# Allegro board Arduino-UNO.brd
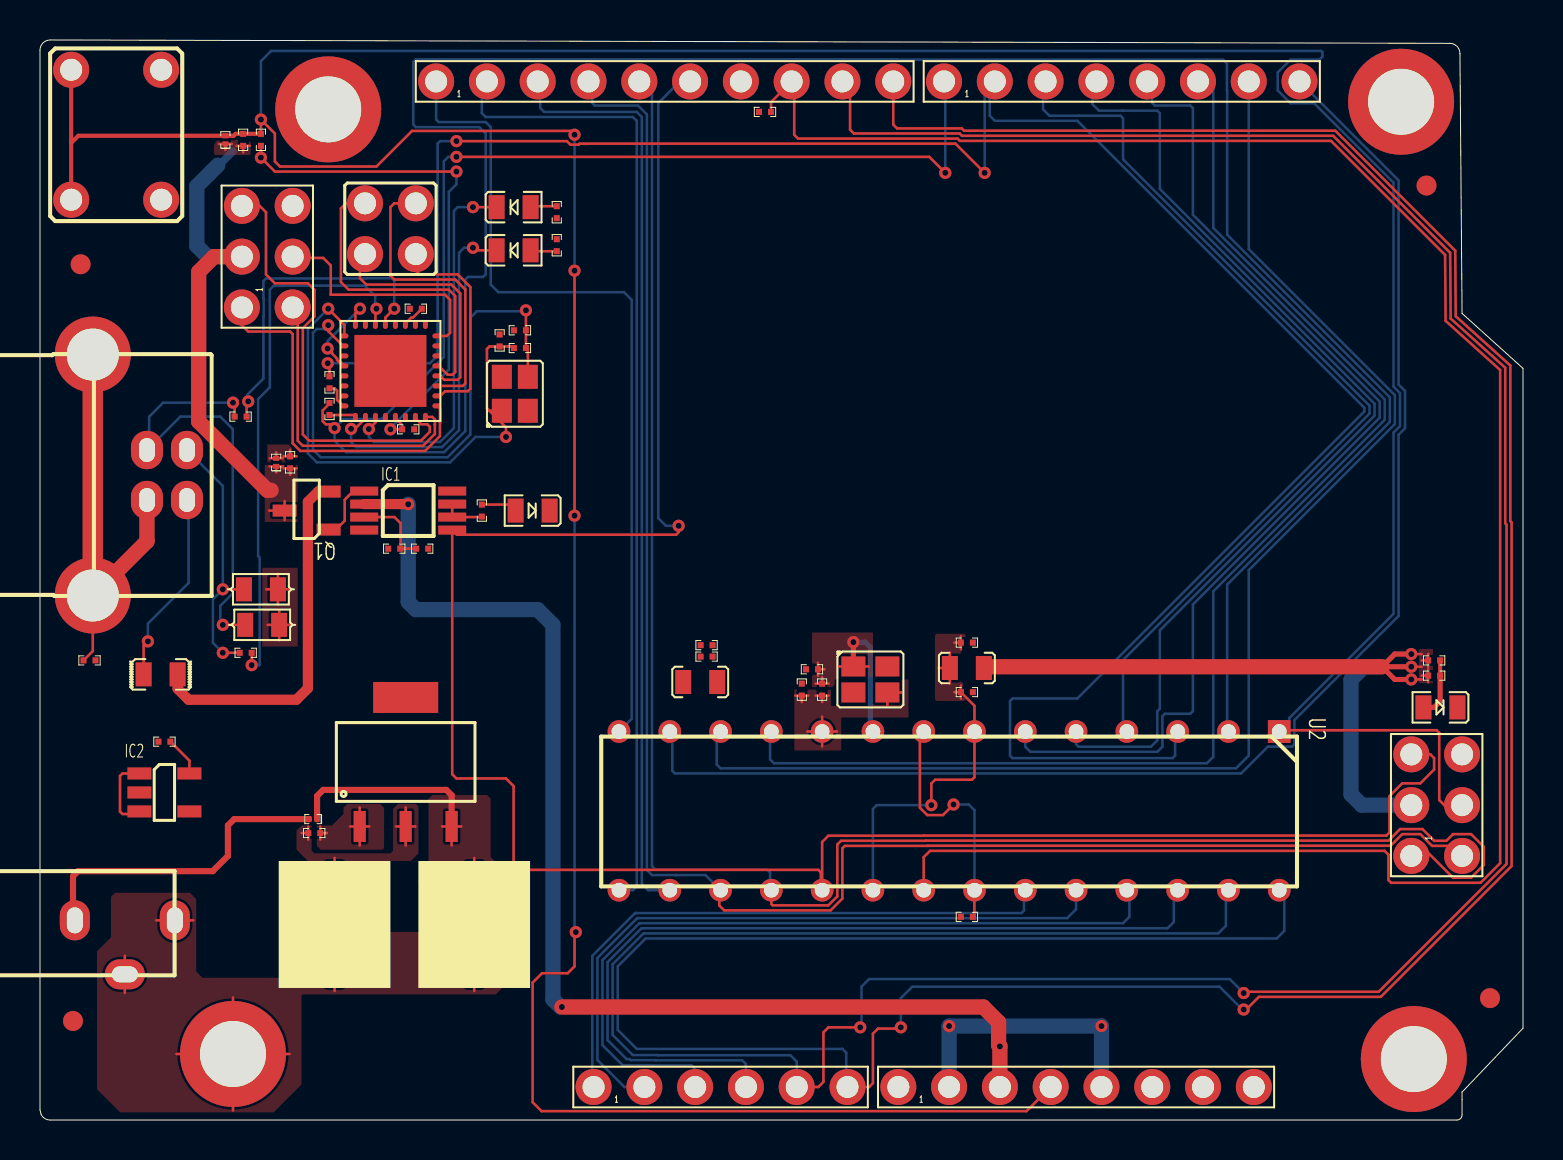
[diagram p0: board, top side]
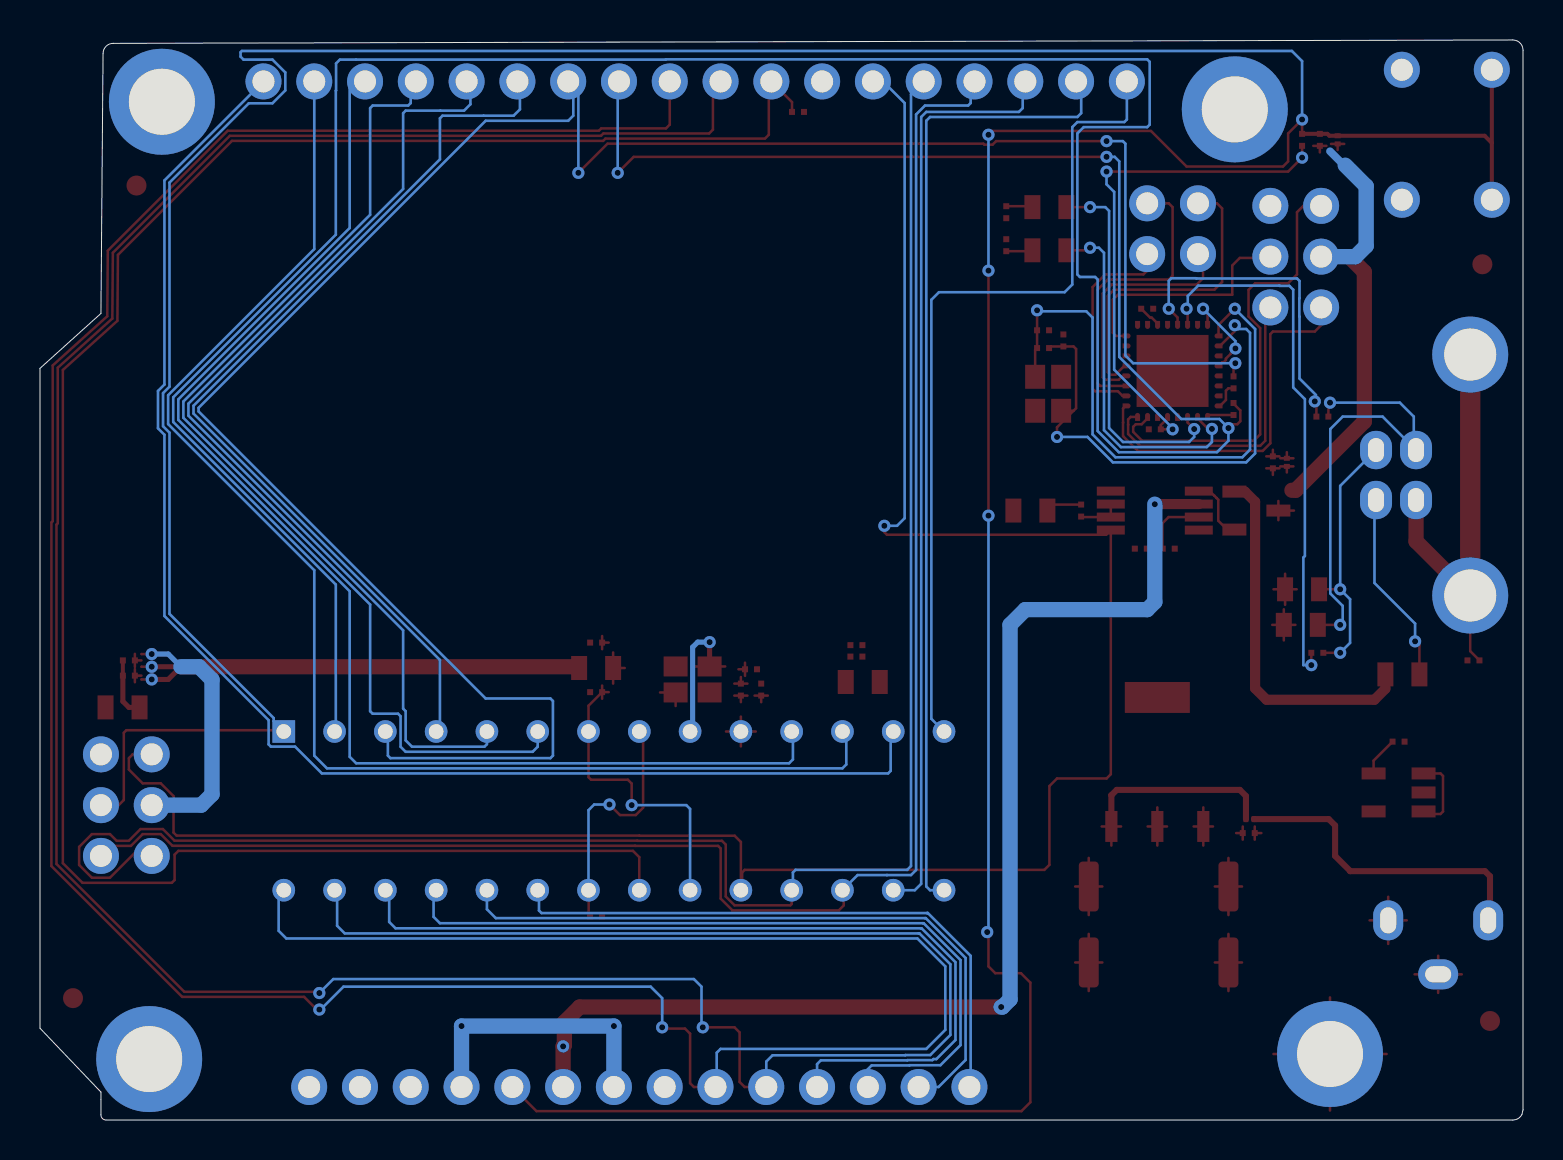
[diagram p1: board, bottom side, seen from below]

Outline 74.17 x 54.02 mm; copper layers: TOP, BOTTOM. Coordinates in mm from the lower left corner of the outline.
Outline path: 0,53.51 arc(0.15,53.87) 0.51,54.02 70.48,53.85 arc(70.86,53.71) 71.01,53.34 71.12,40.34 74.17,37.59 74.17,4.59 71.12,1.4 71.12,0.25 arc(71.05,0.07) 70.87,0 0.51,0 arc(0.24,0.07) 0.06,0.28 0,0.51 0,53.51

## Design rules (mm)
constraint set DEFAULT: min track width 0.127

## Placement (name value [footprint] x y rotation side)
C2  100n  [SMD0603]  36.26 50.42 180 top
C3  100n  [SMD0603]  24 39.5 0 top
C4  100n  [SMD0603]  22.99 38.99 270 top
C5  100n  [SMD0603]  38.1 21.53 270 top
C6  100n  [SMD0603]  33.34 23.18 0 top
C7  100n  [SMD0603]  11.05 49.02 90 top
C8  100n  [SMD0603]  33.34 23.75 0 top
C9  1u  [SMD0603]  18.8 40.58 180 top
C10  100n  [SMD0603]  38.61 22.54 0 top
C13  100n  [SMD0603]  2.48 22.99 180 top
C14  100n  [SMD0603]  46.35 10.16 180 top
C15  47u  [SOLID_CAP_5X5_4]  21.72 9.78 0 top
C16  47u  [SOLID_CAP_5X5_4]  14.73 9.78 0 top
C17  100n  [SMD0603]  13.72 14.35 0 top
C18  1u  [SMD0603]  6.22 18.92 180 top
C19  100n  [SMD0603]  46.35 23.88 0 top
C20  100n  [SMD0603]  46.35 21.4 0 top
CETCE16M0V53-R1  -  [16MHZ]  23.75 36.32 90 top
CETCE16M0V53-R2  -  [16MHZ]  41.53 22.03 0 top
D1  DIODE  [ESD_DIODE]  11.81 32.89 90 top
D2  RED  [LED_0805]  70.04 20.64 180 top
D3  DIODE  [ESD_DIODE]  9.27 49.02 90 top
D5  YELLOW  [LED_0805]  23.69 43.5 0 top
D6  DIODE  [ESD_DIODE]  13.65 15.05 180 top
D7  LED  [LED_0805]  24.64 30.48 180 top
D8  YELLOW  [LED_0805]  23.69 45.66 0 top
F1  MF-MSMF050-2 500mA  [FUSE_0805]  6.03 22.29 0 top
F2  fiducial  [FID2R00_1R00]  72.52 6.1 0 top
F3  fiducial  [FID2R00_1R00]  1.65 4.95 0 top
F4  fiducial  [FID2R00_1R00]  69.34 46.74 0 top
F5  fiducial  [FID2R00_1R00]  2.03 42.8 0 top
IC1  LMV358IDGKR  [SOP-8]  18.41 30.48 0 top
IC2  LP2985-33DBVR  [SOT-5]  6.22 16.38 0 top
J1  POWER  [HEADER1X8]  51.82 1.65 0 top
J2  ICSP1  [HEADER2X3]  11.37 43.18 90 top
J3  ICSP  [HEADER2X3]  69.85 15.75 90 top
J4  HEADER 10  [HEADER1X10]  31.24 51.94 0 top
J5  HEADER 4  [HEADER2X2]  17.53 44.58 180 top
J6  HEADER 8  [HEADER1X8]  54.1 51.94 0 top
J7  USB  [USB2_0_TYPE-B]  6.35 32.26 270 top
J8  HEADER 6  [HEADER1X6]  34.04 1.65 0 top
J9  DC-005C-2A-1.3  [12V-JACK]  1.14 8.64 0 top
L2  BEAD  [BEAD_0805]  33.02 21.91 0 top
L3  BEAD  [BEAD_0805]  46.35 22.61 180 top
Q1  FDN340P  [SOT-3]  13.34 30.48 180 top
R1  10K  [SMD0603]  12.51 32.89 90 top
R2  1K  [SMD0603]  69.72 22.22 0 top
R3  1K  [SMD0603]  69.72 22.99 0 top
R4  10K  [SMD0603]  10.16 49.02 90 top
R5  1M  [SMD0603]  24 38.61 180 top
R7  1M  [SMD0603]  39.12 21.53 90 top
R8  1K  [SMD0603]  18.41 34.54 0 top
R9  1K  [SMD0603]  25.84 45.4 270 top
R10  22R  [SMD0603]  10.29 23.37 0 top
R11  22R  [SMD0603]  10.03 35.18 0 top
R12  1K  [SMD0603]  25.84 43.75 90 top
R13  1K  [SMD0603]  14.48 35.56 90 top
R14  1K  [SMD0603]  14.48 36.89 90 top
R15  10K  [SMD0603]  17.72 28.57 0 top
R16  1K  [SMD0603]  22.1 30.48 90 top
R17  10K  [SMD0603]  19.11 28.57 0 top
RV1  VARISTOR  [VAR_0805]  11.05 26.54 0 top
RV2  VARISTOR  [VAR_0805]  11.11 24.77 0 top
SW1  SW DPST  [SW]  3.81 49.28 90 top
T1  mounthing hole  [MTH]  9.65 3.3 0 top
T2  mounthing hole  [MTH]  68.71 3.05 0 top
T3  mounthing hole  [MTH]  68.07 50.93 0 top
T4  mounthing hole  [MTH]  14.41 50.55 0 top
U1  ATMEGA16U2-MUR  [QFN33]  17.53 37.47 0 top
U2  ATMEGA328P-PU  [DIP28]  61.98 19.43 270 top
U3  NCP1117ST50T3G  [SOT-23]  18.29 17.91 0 top

## Library data of the parts
C2-C10 C13 C14 C17-C20 = CAP NP
C15 C16 = CAP
CETCE16M0V53-R1 CETCE16M0V53-R2 = CRYSTAL_2
D1 D3 D6 = DIODE
D2 D5 D7 D8 = LED
F1 = FUSE
F2-F5 = fiducial
IC1 = LMV358IDGKR
IC2 = LP2985-33DBVR_1
J1 J6 = HEADER 8
J2 J3 = HEADER 6_0
J4 = HEADER 10
J5 = HEADER 4_1
J7 = HEADER 4_2
J8 = HEADER 6
J9 = DC-005C-2A-1.3
L2 L3 = BEAD
Q1 = FDN340P_0
R1-R5 R7-R17 = RESISTOR
RV1 RV2 = VARISTOR
SW1 = SW DPST
T1-T4 = mounthing hole
U1 = ATMEGA16U2-MUR_5
U2 = ATMEGA328P-PU_5
U3 = NCP1117ST50T3G_0

## Footprints (pads in the part's own frame, mm; a bottom-side part is the same pattern mirrored in y, then rotated)
12V-JACK
  oval 1.5x2 hole 0.8x1.3: 1(5.6,1.35) 2(0.6,1.35)
  oval 2x1.5 hole 1.3x0.8: 3(3.1,-1.35)
16MHZ
  rect 1.2x1 smd: 1(-0.85,0.65) 2(0.85,0.65) 3(0.85,-0.65) 4(-0.85,-0.65)
BEAD_0805
  rect 0.8x1.2 smd: 1(-0.85,0) 2(0.85,0)
DIP28
  rect 1.133x1.133 hole 0.733: 1(0,0)
  round 1.133 hole 0.733: 2(0,-2.54) 3(0,-5.08) 4(0,-7.62) 5(0,-10.16) 6(0,-12.7) 7(0,-15.24) 8(0,-17.78) 9(0,-20.32) 10(0,-22.86) 11(0,-25.4) 12(0,-27.94) 13(0,-30.48) 14(0,-33.02) 15(7.938,-33.02) 16(7.938,-30.48) 17(7.938,-27.94) 18(7.938,-25.4) 19(7.938,-22.86) 20(7.938,-20.32) 21(7.938,-17.78) 22(7.938,-15.24) 23(7.938,-12.7) 24(7.938,-10.16) 25(7.938,-7.62) 26(7.938,-5.08) 27(7.938,-2.54) 28(7.938,0)
ESD_DIODE
  rect 0.25x0.3 smd: 1(-0.203,0) 2(0.203,0)
FID2R00_1R00
  round 1 smd: 1(0,0)
FUSE_0805
  rect 0.8x1.2 smd: 1(-0.85,0) 2(0.85,0)
HEADER1X6
  round 1.8 hole 1.1: 1(-6.35,0) 2(-3.81,0) 3(-1.27,0) 4(1.27,0) 5(3.81,0) 6(6.35,0)
HEADER1X8
  round 1.8 hole 1.1: 1(-8.89,0) 2(-6.35,0) 3(-3.81,0) 4(-1.27,0) 5(1.27,0) 6(3.81,0) 7(6.35,0) 8(8.89,0)
HEADER1X10
  round 1.8 hole 1.1: 1(-11.43,0) 2(-8.89,0) 3(-6.35,0) 4(-3.81,0) 5(-1.27,0) 6(1.27,0) 7(3.81,0) 8(6.35,0) 9(8.89,0) 10(11.43,0)
HEADER2X2
  round 1.8 hole 1.1: 1(-1.27,1.27) 2(1.27,1.27) 3(-1.27,-1.27) 4(1.27,-1.27)
HEADER2X3
  round 1.8 hole 1.1: 1(-2.54,1.27) 2(0,1.27) 3(2.54,1.27) 4(-2.54,-1.27) 5(0,-1.27) 6(2.54,-1.27)
LED_0805
  rect 0.8x1.2 smd: 1(-0.85,0) 2(0.85,0)
MTH
  round 5.3 hole 3.3 unplated: (0,0)
QFN33
  custom 0.4x0.25 smd: 1(-2.3,1.75) 2(-2.3,1.25) 3(-2.3,0.75) 4(-2.3,0.25) 5(-2.3,-0.25) 6(-2.3,-0.75) 7(-2.3,-1.25) 8(-2.3,-1.75) 17(2.3,-1.75) 18(2.3,-1.25) 19(2.3,-0.75) 20(2.3,-0.25) 21(2.3,0.25) 22(2.3,0.75) 23(2.3,1.25) 24(2.3,1.75)
  custom 0.25x0.4 smd: 9(-1.75,-2.3) 10(-1.25,-2.3) 11(-0.75,-2.3) 12(-0.25,-2.3) 13(0.25,-2.3) 14(0.75,-2.3) 15(1.25,-2.3) 16(1.75,-2.3) 25(1.75,2.3) 26(1.25,2.3) 27(0.75,2.3) 28(0.25,2.3) 29(-0.25,2.3) 30(-0.75,2.3) 31(-1.25,2.3) 32(-1.75,2.3)
  rect 3.6x3.6 smd: 33(0,0)
SMD0603
  rect 0.3x0.3 smd: 1(-0.3,0) 2(0.3,0)
SOLID_CAP_5X5_4
  rrect 1x2.5 smd: 1(0,1.9) 2(0,-1.9)
SOP-8
  rect 1.4x0.45 smd: 1(-2.2,0.975) 2(-2.2,0.325) 3(-2.2,-0.325) 4(-2.2,-0.975) 5(2.2,-0.975) 6(2.2,-0.325) 7(2.2,0.325) 8(2.2,0.975)
SOT-3
  rect 1.2x0.6 smd: 1(-1.1,0.95) 2(-1.1,-0.95) 3(1.1,0)
SOT-5
  rect 1.2x0.6 smd: 1(-1.25,0.95) 2(-1.25,0) 3(-1.25,-0.95) 4(1.25,-0.95) 5(1.25,0.95)
SOT-23
  rect 0.61x1.549 smd: 1(-2.299,-3.226) 2(0,-3.226) 3(2.299,-3.226)
SW
  round 1.8 hole 1.1: 1(-3.25,2.25) 2(3.25,2.25) 3(-3.25,-2.25) 4(3.25,-2.25)
USB2_0_TYPE-B
  oval 1.92x1.6 hole 1.2x0.8: 1(1.25,1) 2(-1.25,1) 3(-1.25,-1) 4(1.25,-1)
  round 3.8 hole 2.6: 5(-6.025,-3.71) 6(6.025,-3.71)
VAR_0805
  rect 0.8x1.2 smd: 1(-0.85,0) 2(0.85,0)

## Nets
+3V3: IC1.2 J1.3
+5V: C16.1 C17.1 D1.1(K) D3.1(K) IC2.1 IC2.3 J1.2 J1.5 J2.2 J3.2 L2.1 L3.1 Q1.3 R1.1 R2.1 R3.1 R4.1 R9.2 R12.2 U3.2(OUTPUT)
GND: C2.2 C3.1 C4.1 C5.1 C6.2 C8.2 C9.2 C10.1 C13.1 C14.2 C15.2 C16.2 C17.2 C18.2 C19.2 C20.2 D2.1(CATHODE) D7.1(CATHODE) IC1.4 IC2.2 J1.6 J1.7 J2.6 J3.6 J4.7 J9.1 J9.3 R8.2 R17.2 RV1.2 RV2.2 SW1.3 SW1.4(NO2) U1.3 U1.28 U1.33 U3.1
VIN: J1.8 R15.1
AD0: J8.1 U2.23
AD1: J8.2 U2.24
AD2: J8.3 U2.25
AD3: J8.4 U2.26
AD4/SDA: J4.9 J8.5 U2.27
AD5/SCL: J4.10 J8.6 U2.28
AREF: C2.1 J4.8 U2.21
CMP: IC1.3 R15.2 R17.1
GATE_CMD: IC1.1 Q1.1
IO0: J6.1 R13.2 U2.2
IO1: J6.2 R14.2 U2.3
IO2: J6.3 U2.4
IO3: J6.4 U2.5
IO4: J6.5 U2.6
IO5: J6.6 U2.11
IO6: J6.7 U2.12
IO7: J6.8 U2.13
IO8: J4.1 U2.14
IO9: J4.2 U2.15
M8RXD: R13.1 U1.9
M8TXD: R14.1 U1.8
MISO: J3.1 J4.5 U2.18
MISO1: J2.1 U1.17
MOSI: J3.4 J4.4 U2.17
MOSI1: J2.4 U1.16
PB4: J5.1 U1.18
PB5: J5.3 U1.19
PB6: J5.2 U1.20
PB7: J5.4 U1.21
PWRIN: D6.2 J9.2
RESET: C7.2 D3.2 J1.4 J3.5 R4.2 SW1.1 SW1.2 U2.1
RESET1: D1.2 J2.5 R1.2 U1.24
RXLED: D5.1(CATHODE) U1.10
SCK: IC1.5 J3.3 J4.6 U2.19
SCK1: J2.3 U1.15
SS: J4.3 U2.16
TXLED: D8.1(CATHODE) U1.11
USBVCC: F1.2 Q1.2(S) U1.31
N02541: C5.2 CETCE16M0V53-R2.3 R7.1 U2.10
N02568: C10.2 CETCE16M0V53-R2.1 R7.2 U2.9
N04323: D2.2 R2.2 R3.2
N06576: C3.2 CETCE16M0V53-R1.3 R5.1 U1.2
N06640: C4.2 CETCE16M0V53-R1.1 R5.2 U1.1(XTAL1)
N09504: C7.1 R8.1 U1.13
N10186: D5.2 R12.1
N10188: D8.2 R9.1
N15357: C6.1 C8.1 L2.2 U1.4 U1.32
N15720: C9.1 U1.27
N16909: C14.1 U2.8 U2.22
N17127: J7.2 R10.1 RV1.1
N17131: J7.3 R11.1 RV2.1
N17135: R10.2 U1.30
N17147: R11.2 U1.29
N17571: F1.1 J7.1(VCC)
N17575: C13.2 J7.4 J7.5 J7.6
N25653: IC1.6 IC1.7 R16.1
N27375: C15.1 D6.1(K) U3.3
N62613: C19.1 C20.1 L3.2 U2.7(VCC) U2.20
N244544: C18.1 IC2.5(VOUT)
N255471: D7.2 R16.2

Pads without a net: CETCE16M0V53-R1 2 4; CETCE16M0V53-R2 2 4; F2 1; F3 1; F4 1; F5 1; IC1 8; IC2 4; J1 1; U1 5 6 7 12 14 22 23 25 26

## Via types
v1: diameter 0.61, hole 0.305, TOP to BOTTOM, 49 vias

## Routing (per net, layer and track width the routed paths; a pad name or vN(x,y) marks a point on that pad's centre or on a via; arc(x,y) is an arc through that point)
+3V3: length 59.6
  TOP w0.508: IC1.2 18.41,30.8 v1(18.41,30.8)
  TOP w0.762: v1(26.1,5.65) 47.18,5.65 47.94,4.89 47.94,3.75 v1(48.01,3.68) J1.3
  BOTTOM w0.762: v1(26.1,5.65) 26.04,5.65 25.65,6.03 25.65,24.77 24.89,25.53 18.8,25.53 18.41,25.91 v1(18.41,30.8)
+5V: length 95.1
  TOP w0.127: U3.2 18.29,15.63 ; U3.2 17.81,14.68 ; U3.2 18.29,13.73 ; U3.2 18.77,14.68 ; 69.42,21.9 R2.1 ; R2.1 69.42,22.55 ; R2.1 69.1,22.22 ; 11.48,32.69 D1.1 ; D1.1 12.14,32.69 ; D1.1 11.81,32.39 ; v1(68.58,23.3) 69.09,23.3 ; C16.1 15.41,11.68 ; C16.1 14.73,13.11 ; C16.1 14.05,11.68 ; C16.1 14.73,10.25 ; 12.18,32.59 R1.1 ; R1.1 12.51,32.27 ; R1.1 12.84,32.59 ; 11.46,30.48 Q1.3 ; Q1.3 12.24,30 ; Q1.3 12.24,30.96 ; 8.94,48.82 D3.1 ; D3.1 9.6,48.82 ; D3.1 9.27,48.52 ; 69.1,22.99 R3.1 ; R3.1 69.42,23.31 ; R3.1 69.42,22.66 ; 13.42,14.02 C17.1 ; C17.1 13.09,14.35 ; C17.1 13.42,14.68 ; v1(68.58,22.03) 69.09,22.03 ; R4.1 10.49,48.72 ; R4.1 9.83,48.72 ; R4.1 10.16,48.39 ; v1(68.58,22.67) 69.09,22.67 ; IC2.3 4.84,15.3 4.13,15.3 4,15.43 4,17.21 4.13,17.33 IC2.1
  TOP w0.254: 67.12,22.67 67.75,23.3 v1(68.58,23.3) ; 67.12,22.67 67.75,22.03 v1(68.58,22.03) ; 67.12,22.67 v1(68.58,22.67)
  TOP w0.762: J2.2 8.7,43.18 7.94,42.42 7.94,34.93 11.37,31.5 11.56,31.5 ; 67.12,22.67 47.27,22.67 L3.1
  BOTTOM w0.254: 67.12,22.67 67.75,23.3 v1(68.58,23.3)
  BOTTOM w0.381: 8.89,47.75 8.95,47.75 9.65,48.45
  BOTTOM w0.762: 67.12,22.67 66.21,22.67 65.56,22.02 65.56,16.29 66.1,15.75 J3.2 ; 8.89,47.75 7.84,46.71 7.84,43.72 8.38,43.18 J2.2 ; J1.5 v1(53.09,4.7) v1(45.47,4.7) J1.2
GND: length 37.4
  TOP w0.127: 11.96,23.99 RV2.2 ; RV2.2 11.96,25.54 ; RV2.2 11.38,24.77 ; RV2.2 12.54,24.77 ; 14.73,6.45 C16.2 ; C16.2 14.05,7.88 ; C16.2 15.41,7.88 ; C16.2 14.73,9.31 ; C15.2 21.72,9.31 ; C15.2 21.04,7.88 ; C15.2 22.39,7.88 ; C15.2 21.72,6.45 ; 9.65,0.47 9.65,3.3 ; 9.65,3.3 12.48,3.3 ; 9.65,3.3 9.65,6.13 ; 9.65,3.3 6.82,3.3 ; 4.24,6.36 J9.3 ; J9.3 5.42,7.29 ; J9.3 3.07,7.29 ; J9.3 4.24,8.21 ; 15.51,14.68 U3.1 ; U3.1 15.99,15.63 ; U3.1 16.47,14.68 ; U3.1 15.99,13.73 ; 5.82,9.99 J9.1 ; J9.1 7.67,9.99 ; J9.1 6.74,8.81 ; J9.1 6.74,11.16 ; 14.02,14.02 C17.2 ; C17.2 14.34,14.35 ; C17.2 14.02,14.68 ; 11.9,25.77 RV1.2 ; RV1.2 11.9,27.32 ; RV1.2 11.32,26.54 ; RV1.2 12.48,26.54
AD0: length 30.2
  BOTTOM w0.127: J8.1 27.62,1.71 27.62,8.21 29.76,10.35 29.81,10.35 49.09,10.35 49.21,10.48 49.21,11.43 U2.23
AD1: length 33.9
  BOTTOM w0.127: J8.2 30.23,1.65 29.23,1.65 27.88,3 27.88,8.1 29.87,10.1 29.91,10.1 51.37,10.1 51.82,10.54 U2.24
AD2: length 39.3
  BOTTOM w0.127: 54,11.49 U2.25 54.48,11.37 54.48,10.16 54.17,9.84 29.97,9.84 28.13,8 28.13,3.75 29.14,2.74 30.68,2.74 30.69,2.73 32.58,2.73 32.77,2.54 J8.3
AD3: length 43.3
  BOTTOM w0.127: J8.4 35.31,2.79 35.12,2.98 30.79,2.98 30.78,3 29.54,3 29.49,3.05 29.34,3.05 28.38,4 28.38,7.89 30.08,9.59 30.12,9.59 56.39,9.59 56.71,9.91 56.71,11.3 U2.26
AD4/SDA: length 158.1
  TOP w0.127: J4.9 40.51,51.56 40.51,49.53 40.7,49.34 45.99,49.34 46.11,49.22 64.67,49.22 70.52,43.37 70.55,40.08 73.28,37.62 73.28,29.84 73.34,29.78 73.34,12.81 66.95,6.41 60.26,6.41 v1(60.2,6.35) ; v1(41.02,4.64) 39.43,4.64 39.18,4.38 39.18,1.91 38.93,1.65 J8.5
  BOTTOM w0.127: U2.27 59.31,11.37 59.31,9.72 58.93,9.33 30.18,9.33 28.64,7.79 28.64,4.25 29.64,3.25 30.89,3.25 30.9,3.24 37.53,3.24 37.85,2.92 J8.5 ; v1(41.02,4.64) 41.08,4.7 41.08,6.67 41.47,7.05 59.5,7.05 v1(60.2,6.35)
AD5/SCL: length 159
  TOP w0.127: J8.6 41.47,1.65 41.66,1.84 41.66,4.32 41.91,4.57 42.99,4.57 v1(43.05,4.64) ; v1(60.2,5.52) 60.33,5.52 60.96,6.16 67.06,6.16 73.6,12.7 73.6,29.89 73.53,29.95 73.53,37.74 70.8,40.2 70.78,43.48 64.78,49.48 46.22,49.48 46.1,49.59 42.86,49.59 42.67,49.78 J4.10
  BOTTOM w0.127: v1(60.2,5.52) 60.13,5.52 58.99,6.67 43.62,6.67 43.05,6.1 v1(43.05,4.64) ; J8.6 40.32,1.71 40.32,3.37 40.13,3.56 29.84,3.56 28.89,4.51 28.89,7.68 30.29,9.08 61.85,9.08 62.23,9.46 62.23,11.24 U2.28
AREF: length 103.8
  TOP w0.127: C2.1 36.56,50.91 J4.8 37.72,51.82 37.72,49.28 37.91,49.09 45.89,49.09 46,48.97 64.57,48.97 70.27,43.27 70.3,39.97 73.03,37.51 73.03,12.85 72.04,11.86 67.57,11.86 67.44,12 67.44,13.27 67.25,13.46 44.51,13.46 44.2,13.14 U2.21
CMP: length 4
  TOP w0.127: IC1.3 16.22,30.15 17.72,30.15 18.03,29.84 18.03,28.59 R15.2 18.02,28.57 18.81,28.57 R17.1
GATE_CMD: length 3.2
  TOP w0.127: Q1.1 14.8,29.53 15.24,29.97 15.24,31.02 15.67,31.45 16.21,31.45 IC1.1
IO0: length 160.2
  TOP w0.127: v1(14.73,34.61) 14.54,34.8 14.29,34.8 14.14,34.95 14.14,35.49 14.48,35.83 R13.2 ; v1(45.28,47.37) 44.48,48.17 v1(20.83,48.17)
  BOTTOM w0.127: J6.1 45.28,51.88 v1(45.28,47.37) ; U2.2 59.37,19.49 59.37,26.78 67.51,34.91 67.51,36.14 59.37,44.28 59.37,51.48 59.36,51.49 59.36,52.84 59.17,53.03 58.36,53.03 42.88,53.03 42.86,53.05 18.8,53.05 18.67,52.92 18.67,49.78 18.8,49.66 21.97,49.66 22.29,49.34 22.29,42.29 22.16,42.16 21.4,42.16 21.27,42.04 21.27,34.46 20.21,33.4 15.3,33.4 14.73,33.97 v1(14.73,34.61) 15.19,35.06 17.09,35.06 20.19,38.16 20.19,47.94 20.42,48.17 v1(20.83,48.17)
IO1: length 112.7
  TOP w0.127: v1(47.24,47.37) 45.78,48.83 26.99,48.83 26.94,48.78 26.53,48.78 26.35,48.96 v1(20.83,48.96) ; v1(14.39,37.85) 14.48,37.76 R14.2
  BOTTOM w0.127: v1(20.83,48.96) 20.01,48.96 19.89,48.83 19.89,38.24 19.5,37.85 v1(14.39,37.85) ; v1(47.24,47.37) 47.24,51.44 J6.2 47.5,51.69 47.5,50.23 47.75,49.97 51.88,49.97 66.24,35.62 66.24,35.44 51.88,21.08 48.64,21.08 48.51,20.95 48.51,18.22 48.64,18.1 56.64,18.1 56.77,18.22 56.77,19.3 U2.3
IO2: length 46.6
  BOTTOM w0.127: J6.3 50.16,51.82 50.16,50.55 50.48,50.23 51.98,50.23 54.04,50.23 54.17,50.1 54.17,48.05 66.49,35.72 66.49,35.33 54.17,23.01 54.17,19.62 U2.4
IO3: length 50
  BOTTOM w0.127: J6.4 52.64,51.75 52.64,50.8 52.96,50.48 54.14,50.48 55.88,50.48 56.01,50.36 56.01,46.57 66.74,35.83 66.74,35.23 56.01,24.49 56.01,20.57 55.88,20.45 55.88,18.99 55.56,18.67 51.94,18.67 51.82,18.8 U2.5
IO4: length 52.2
  BOTTOM w0.127: J6.5 55.63,51.69 55.63,50.86 55.75,50.74 57.53,50.74 57.66,50.61 57.66,45.27 67,35.93 67,35.12 57.66,25.78 57.66,20.45 57.53,20.32 56.26,20.32 56.13,20.19 56.13,18.67 55.88,18.41 49.53,18.41 49.28,18.67 U2.6
IO5: length 65.4
  BOTTOM w0.127: U2.11 36.51,19.37 36.51,18.03 36.7,17.84 58.36,17.84 58.68,18.17 58.68,26.44 67.25,35.02 67.25,36.04 58.68,44.61 58.68,51.82 58.55,51.94 57.91,51.94 J6.6
IO6: length 68.5
  BOTTOM w0.127: J6.7 60.45,43.56 67.76,36.25 67.76,34.81 60.45,27.5 60.45,18.22 59.82,17.59 34.04,17.59 33.85,17.78 33.85,19.24 U2.12
IO7: length 71.4
  BOTTOM w0.127: 31.5,19.43 U2.13 31.62,19.3 31.62,17.46 31.75,17.34 60.07,17.34 61.41,18.67 62.62,18.67 62.73,18.79 62.73,20 67.94,25.21 67.94,34.27 68.27,34.6 68.27,36.46 67.94,36.78 67.94,46.99 62.99,51.94 J6.8
IO8: length 41.9
  BOTTOM w0.127: 28.96,19.43 29.59,20.07 29.59,41.02 29.21,41.4 22.92,41.4 22.54,41.78 22.54,49.66 22.29,49.91 19.94,49.91 19.81,50.04 J4.1
IO9: length 48.9
  BOTTOM w0.127: J4.2 22.1,51.69 22.1,50.36 22.29,50.16 29.65,50.16 29.84,49.97 29.84,11.68 29.65,11.49 U2.15
M8RXD: length 1.3
  TOP w0.127: U1.9 15.68,35.26 R13.1
M8TXD: length 1.4
  TOP w0.127: U1.8 15.15,35.71 14.86,36.01 14.86,36.47 14.74,36.59 R14.1
MISO: length 92
  TOP w0.127: J3.1 68.83,13.46 69.33,13.46 70.67,12.12 71.57,12.12 72.21,12.76 72.21,13.66 71.57,14.3 70.67,14.3 70.33,13.96 69.73,13.96 69.14,14.55 68.02,14.55 67.44,13.97 44.3,13.97 44.3,13.96 40.06,13.96 39.87,13.77 39.87,11.18 39.43,10.74 36.64,10.74 36.58,10.8 U2.18
  BOTTOM w0.127: J4.5 29.97,51.94 30.61,51.31 30.61,12.7 30.8,12.51 36.39,12.51 36.51,12.38 36.51,11.56 U2.18
MISO1: length 18.5
  TOP w0.127: U1.17 19.88,35.71 20,35.59 20,34.88 20,34.88 20,34.21 19.26,33.46 13.02,33.46 12.64,33.85 12.64,39.31 12.51,39.43 10.41,39.43 10.1,39.75 J2.1
MOSI: length 87.6
  TOP w0.127: J3.4 70.62,13.71 69.62,13.71 69.03,14.3 68.13,14.3 67.55,13.72 44.41,13.72 44.4,13.71 40.25,13.71 40.13,13.58 40.13,11.07 39.53,10.48 34.22,10.48 33.97,10.73 33.97,11.43 U2.17
  BOTTOM w0.127: U2.17 33.28,12.25 31.81,12.25 30.61,12.25 30.35,12.5 30.35,50.29 29.91,50.74 27.75,50.74 27.62,50.86 27.62,51.75 J4.4
MOSI1: length 15.2
  TOP w0.127: J2.4 12.89,40.39 12.89,33.97 13.14,33.72 19.16,33.72 19.75,34.31 19.75,34.77 19.75,34.78 19.75,35.04 19.62,35.16 U1.16
PB4: length 10.8
  TOP w0.127: J5.1 18.8,42.48 18.99,42.29 20.89,42.29 21.53,41.66 21.53,36.58 21.4,36.45 20.26,36.45 20.03,36.21 U1.18
PB5: length 15
  TOP w0.127: J5.3 17.72,45.85 17.53,45.66 17.53,42.23 17.72,42.04 20.76,42.04 21.27,41.53 21.27,36.84 21.15,36.71 U1.19
PB6: length 12.2
  TOP w0.127: U1.20 20.02,37.21 20.21,37.02 20.89,37.02 21.02,37.15 21.02,41.34 20.57,41.78 16.32,41.78 16,42.1 16,43.05 J5.2
PB7: length 16
  TOP w0.127: J5.4 15.3,45.85 15.05,45.59 15.05,41.91 15.43,41.53 20.45,41.53 20.76,41.21 20.76,37.4 20.64,37.27 20.38,37.27 19.94,37.71 U1.21
PWRIN: length 16.1
  TOP w0.305: D6.2 9.72,15.05 9.4,14.73 9.4,13.21 8.65,12.46 8.65,12.45 1.91,12.45 1.65,12.19 1.65,10.08 J9.2
RESET: length 222.2
  TOP w0.127: J3.5 70.23,15.75 69.98,16 69.98,19.37 69.85,19.49 62.04,19.49 U2.1 ; v1(26.73,42.48) v1(26.73,30.23) ; C7.2 v1(11.05,50.04) 11.75,49.34 11.75,47.94 12,47.69 16.83,47.69 18.61,49.47 26.54,49.47 v1(26.73,49.28) ; J1.4 49.34,0.44 25.08,0.44 24.64,0.89 24.64,6.87 25.11,7.34 26.39,7.34 26.73,7.68 26.73,9.33 v1(26.8,9.4)
  TOP w0.203: 1.56,48.87 1.92,49.23 9.27,49.23 D3.2 9.68,49.23 9.78,49.32 R4.2 C7.2 ; 1.56,48.87 SW1.1 ; 1.56,48.87 SW1.2
  BOTTOM w0.127: v1(26.73,42.48) v1(26.73,49.28) ; U2.1 62.48,19.93 62.48,20.1 67.69,25.31 67.69,34.38 68.01,34.7 68.01,36.35 67.69,36.68 67.69,46.88 63.72,50.85 62.54,50.85 61.9,51.49 61.9,52.39 62.54,53.03 63.99,53.03 64.14,53.18 64.14,53.4 64.07,53.47 11.56,53.47 11.05,52.96 v1(11.05,50.04) ; v1(26.73,30.23) 26.73,9.46 v1(26.8,9.4)
RESET1: length 14
  TOP w0.127: J2.5 12.7,43.12 14.16,43.12 14.54,42.74 14.54,41.27 20.26,41.27 20.51,41.02 20.51,39.37 20.36,39.21 19.83,39.21 U1.24 ; D1.2 11.81,33.4 ; D1.2 12.14,33.1 ; D1.2 11.48,33.1 ; R1.2 12.51,33.52 ; R1.2 12.84,33.19 ; R1.2 12.18,33.19
RXLED: length 18.4
  TOP w0.127: v1(15.56,34.57) 15.75,34.57 16.28,35.09 U1.10 ; v1(21.65,43.62) 21.78,43.5 D5.1
  BOTTOM w0.127: v1(21.65,43.62) 21.21,43.62 20.95,43.37 20.95,34.5 20.11,33.65 15.81,33.65 15.56,33.91 v1(15.56,34.57)
SCK: length 109
  TOP w0.127: v1(31.94,29.72) 31.94,29.4 31.81,29.27 20.85,29.27 IC1.5 20.61,17.29 20.83,17.08 23.3,17.08 23.69,16.7 23.69,12.76 23.94,12.51 38.93,12.51 39.05,12.38 39.05,11.56 U2.19 39.12,13.91 39.43,14.22 44.19,14.22 44.2,14.22 67.34,14.22 67.49,14.38 67.49,16.2 68.13,16.84 69.03,16.84 69.72,17.53 69.72,18.1 69.53,18.29 J3.3
  BOTTOM w0.127: J4.6 32,51.94 30.92,50.86 30.92,30.1 31.31,29.72 v1(31.94,29.72)
SCK1: length 22.5
  TOP w0.127: J2.3 10.99,45.72 11.3,45.4 11.3,42.29 11.75,41.85 13.4,41.85 13.73,41.52 13.73,40.19 13.14,39.61 13.14,34.29 13.46,33.97 19.05,33.97 19.5,34.42 19.5,34.67 19.37,34.8 19.07,34.8 18.8,35.07 18.8,35.14 U1.15
SS: length 46.5
  BOTTOM w0.127: U2.16 30.42,11.49 30.1,11.81 30.1,50.16 29.84,50.42 25.21,50.42 25.02,50.61 25.02,51.82 J4.3
TXLED: length 18.9
  TOP w0.127: D8.1 v1(21.65,45.66) ; v1(16.45,34.56) 16.78,34.89 U1.11
  BOTTOM w0.127: v1(16.45,34.56) 16.45,34.16 16.7,33.91 20,33.91 20.7,34.61 20.7,45.47 20.89,45.66 v1(21.65,45.66)
USBVCC: length 18.3
  TOP w0.508: F1.2 6.88,21.57 7.43,21.02 12.83,21.02 13.4,21.59 13.4,30.92 13.91,31.43 Q1.2
N02541: length 6.4
  TOP w0.127: 38.79,21.23 R7.1 ; R7.1 39.44,21.23 ; R7.1 39.12,20.9 ; 39.12,18.69 U2.10 ; U2.10 38.37,19.43 ; U2.10 39.86,19.43 ; U2.10 39.12,20.18 ; 38.1,20.9 C5.2 ; C5.2 37.77,21.23 ; C5.2 38.43,21.23 ; 42.38,20.71 CETCE16M0V53-R2.3 43.16,21.38
N02568: length 10
  TOP w0.127: 38.91,22.21 C10.2 ; C10.2 38.91,22.87 ; C10.2 39.24,22.54 ; 38.79,21.83 R7.2 ; R7.2 39.44,21.83 ; R7.2 39.12,22.15 ; 39.9,22.68 CETCE16M0V53-R2.1 41.46,22.68
  TOP w0.254: CETCE16M0V53-R2.1 v1(40.68,23.9)
  BOTTOM w0.254: U2.9 41.53,19.56 41.53,23.65 41.27,23.9 v1(40.68,23.9)
N04323: length 3
  TOP w0.203: R3.2 R2.2
  TOP w0.254: R2.2 70.02,20.94 69.72,20.64 D2.2
N06576: length 28.9
  TOP w0.127: v1(14.41,39.75) 14.41,39.45 15.15,38.72 U1.2 ; CETCE16M0V53-R1.3 24.4,38.51 R5.1 C3.2 v1(24.3,40.5)
  BOTTOM w0.127: v1(24.3,40.5) 24.26,40.45 21.84,40.45 21.53,40.13 21.53,34.29 20.38,33.15 14.03,33.15 13.65,33.53 13.65,39.37 13.84,39.56 14.22,39.56 v1(14.41,39.75) 14.41,39.84
N06640: length 26.8
  TOP w0.127: R5.2 23.62,38.69 22.99,38.69 C4.2 22.99,38.69 22.48,38.69 22.35,38.56 22.35,35.6 22.48,35.47 ; 22.48,35.47 23.3,34.65 v1(23.3,34.16) ; 22.48,35.47 CETCE16M0V53-R1.1 ; U1.1 15.23,39.76 v1(14.41,40.58)
  BOTTOM w0.127: v1(14.41,40.58) 13.4,39.56 13.4,33.34 13.84,32.89 20.51,32.89 21.78,34.16 v1(23.3,34.16)
N09504: length 26.3
  TOP w0.127: C7.1 v1(11.05,48.13) 11.75,47.43 v1(20.83,47.43) ; U1.13 17.78,35.09 18.12,34.75 R8.1 18.11,34.54 v1(17.53,34.54)
  BOTTOM w0.127: v1(17.53,34.54) 17.53,34.61 20.45,37.53 20.45,46.42 20.83,46.8 v1(20.83,47.43)
N10186: length 1.3
  TOP w0.127: R12.1 24.58,43.45 D5.2
N10188: length 1.3
  TOP w0.127: D8.2 24.58,45.7 R9.1
N15357: length 4.8
  TOP w0.127: v1(14.38,38.59) 14.61,38.36 14.61,38.34 14.86,38.08 14.86,38.01 14.97,37.9 15.04,37.9 U1.4 ; U1.32 15.78,40.35 v1(16,40.58)
  BOTTOM w0.127: v1(16,40.58) 14.38,38.96 v1(14.38,38.59)
N15720: length 1.2
  TOP w0.127: C9.1 18.65,40.13 18.57,40.13 18.28,39.84 U1.27 18.29,39.78
N16909: length 12.5
  TOP w0.127: v1(45.69,15.78) 45.16,15.25 44.37,15.25 44.01,15.62 44.01,19.24 U2.8 ; U2.22 46.73,11.49 46.73,10.23 C14.1
  BOTTOM w0.127: v1(45.69,15.78) 46.45,15.78 46.74,15.49 U2.22
N17127: length 13.2
  TOP w0.127: R10.1 v1(9.14,23.37) ; RV1.1 v1(9.14,26.54)
  BOTTOM w0.127: v1(9.14,23.37) 8.65,23.86 8.65,26.05 v1(9.14,26.54) 9.14,31.71 J7.2
N17131: length 23.2
  TOP w0.127: v1(9.65,35.88) 9.73,35.8 R11.1 ; RV2.1 v1(9.14,24.77)
  BOTTOM w0.127: v1(9.14,24.77) 9.02,24.89 9.02,25.72 9.64,26.34 9.64,34.56 9.02,35.18 7.02,35.18 5.46,33.62 ; 5.46,33.62 5.46,35.18 6.16,35.88 v1(9.65,35.88) ; 5.46,33.62 J7.3
N17135: length 27.1
  TOP w0.127: U1.30 16.78,40.52 v1(16.83,40.58) ; R10.2 v1(10.59,22.75)
  BOTTOM w0.127: v1(10.59,22.75) 10.99,22.75 10.99,28.13 10.91,28.21 10.91,36.06 11.49,36.64 11.49,41.53 11.68,41.72 12.17,41.72 12.18,41.73 16.25,41.73 16.76,41.21 16.76,40.64 v1(16.83,40.58)
N17147: length 15.9
  TOP w0.127: v1(17.72,40.58) 17.28,40.14 U1.29 ; R11.2 10.33,35.86 v1(10.41,35.94)
  BOTTOM w0.127: 10.35,36.26 11.18,37.08 11.18,40.18 11.19,40.19 11.19,41.09 11.18,41.1 11.18,41.96 11.3,42.09 16.33,42.09 16.34,42.1 17.59,42.1 17.72,41.97 v1(17.72,40.58)
N17571: length 9.7
  TOP w0.127: v1(5.4,23.94) 5.18,23.72 F1.1
  BOTTOM w0.127: v1(5.4,23.94) 5.4,24.83 7.43,26.86 7.43,30.93 J7.1
N17575: length 21.4
  TOP w0.127: J7.6 2.64,23.45 C13.2
  TOP w0.762: J7.6 5.35,28.94 J7.4
  TOP w1.016: J7.6 J7.5
N25653: length 2.1
  TOP w0.127: IC1.7 IC1.6 20.62,30.15 22.07,30.15 R16.1
N27375: length 15.8
  TOP w0.127: 21.04,11.68 C15.1 ; C15.1 21.72,13.11 ; C15.1 21.72,10.25 ; C15.1 22.39,11.68 ; 20.1,14.68 U3.3 ; U3.3 21.07,14.68 ; U3.3 20.59,13.73
  TOP w0.305: U3.3 20.59,16.24 20.32,16.51 14.16,16.51 13.86,16.21 D6.1
N62613: length 19.1
  TOP w0.127: 45.73,21.4 C20.1 ; C20.1 46.06,21.73 ; C20.1 46.74,20.72 U2.7 46.74,17.14 46.61,17.02 44.77,17.02 44.58,16.83 v1(44.58,15.75) ; C20.1 46.06,21.07 ; 44.93,22.61 L3.2 ; L3.2 45.5,21.83 ; L3.2 45.5,23.38 ; 45.73,23.88 C19.1 ; C19.1 46.06,24.2 ; C19.1 46.06,23.55
  BOTTOM w0.127: U2.20 41.66,15.56 41.85,15.75 v1(44.58,15.75)
N244544: length 2
  TOP w0.127: IC2.5 7.47,17.97 C18.1
N255471: length 1.8
  TOP w0.127: R16.2 23.49,30.78 D7.2

## Copper pours and planes (outline as drawn; the poured copper is in the pictures)
+5V on TOP: 12.89,32.77 12.89,29.91 11.24,29.91 11.24,32.77
+5V on TOP: 13.59,13.46 13.59,14.73 13.08,14.73 12.83,14.48 12.83,13.53 13.53,12.83 13.78,12.83 13.78,10.22 13.9,10.1 14.1,10.1 15.62,10.1 15.75,10.22 15.75,12.89 15.81,12.95 18.54,12.95 18.92,13.34 18.92,15.68 18.8,15.81 17.91,15.81 17.65,15.56 17.65,13.46 17.53,13.34 13.72,13.34
+5V on TOP: 68.96,23.49 68.96,21.91 69.02,21.84 69.66,21.84 69.66,23.56 69.02,23.56
+5V on TOP: 8.76,48.83 8.76,48.9 8.89,49.02 10.41,49.02 10.54,48.9 10.54,48.32 10.48,48.26 8.76,48.26 8.7,48.32 8.7,48.77
GND on TOP: 3.56,9.14 2.86,8.45 2.86,1.52 4,0.38 11.68,0.38 13.08,1.78 13.08,6.22 13.14,6.29 22.8,6.29 23.24,6.73 23.24,8.95 22.8,9.4 12.57,9.4 12.06,8.89 12.06,7.11 8.13,7.11 7.81,7.43 7.81,11.05 7.49,11.37 3.75,11.37 3.56,11.18
GND on TOP: 13.84,14.73 13.84,13.72 14.03,13.53 17.14,13.53 17.21,13.59 17.21,15.62 17.02,15.81 15.37,15.81 15.18,15.62 15.18,15.3 14.61,14.73
GND on TOP: 11.11,27.62 11.11,23.69 12.89,23.69 12.89,27.62
Net_82 on TOP (solid shape): 19.91,20.36 16.66,20.36 16.66,21.91 19.91,21.91
RESET1 on TOP: 11.37,32.89 12.89,32.89 12.89,33.78 11.37,33.78
N02541 on TOP: 37.72,21.53 39.56,21.53 39.56,20.7 41.53,20.7 41.59,20.76 41.59,22.03 43.43,22.03 43.43,20.13 40.07,20.13 40.07,18.48 37.72,18.48
N02568 on TOP: 38.61,24.38 38.61,21.65 38.67,21.59 39.56,21.59 39.75,21.78 39.75,22.03 41.66,22.03 41.66,24.38
N27375 on TOP: 19.43,16.07 19.43,12.76 20.45,11.75 20.45,9.97 20.76,9.65 23.24,9.65 23.81,10.22 23.81,11.87 22.54,13.14 22.54,16.07 22.35,16.26 19.62,16.26
N62613 on TOP: 44.83,24.32 46.23,24.32 46.29,24.26 46.29,23.62 46.04,23.37 46.04,21.97 46.29,21.72 46.29,21.02 46.23,20.95 44.83,20.95 44.77,21.02 44.77,24.26
